# EAGLE board miniArduino (EAGLE 7.7.0)

Size 180.65 x 54.6 mm. Coordinates in mm from the lower left corner, seen from the top.
Outline: 0,0 180.65,0 180.65,54.6 0,54.6 0,0
Copper layers (1*16): Top 0.035mm / dielectric 1.5mm / Bottom 0.035mm
Design rules "default": minimum track width 10mil, minimum drill 24mil, track to track 8mil, track to pad 8mil, pad to pad 8mil, via to via 8mil, smd to smd 8mil, copper to edge 40mil, drill to drill 8mil, minimum pad ring 10mil, minimum via ring 8mil, stop-mask expansion 4mil, vias tented up to drill 0mil, thermal gap 10mil

## Footprints (pad centres in the part's own frame; a part is rotated, then mirrored left to right if it is on the bottom)
C0805 = smd 1.3 x 1.5: 1 -0.95,0; 2 0.95,0
2X3 = drill 1.016 pad 1.88 octagon: 1 0,0; 2 0,2.54; 3 2.54,0; 4 2.54,2.54; 5 5.08,0; 6 5.08,2.54
CHIP-LED0805 = smd 1.2 x 1.2: A 0,-1.05; C 0,1.05
PJ-102A = drill 3 pad 4.8: RING 0.1,-3.39; RING_SW -4.6,-6.29; TIP 0.1,-9.29
1X05 = drill 1.016 long: 1 -5.08,0; 2 -2.54,0; 3 0,0; 4 2.54,0; 5 5.08,0
R0805 = smd 1.3 x 1.5: 1 -0.95,0; 2 0.95,0
2X10 = drill 1.016 octagon: 1 -11.43,-1.27; 2 -11.43,1.27; 3 -8.89,-1.27; 4 -8.89,1.27; 5 -6.35,-1.27; 6 -6.35,1.27; 7 -3.81,-1.27; 8 -3.81,1.27; 9 -1.27,-1.27; 10 -1.27,1.27; 11 1.27,-1.27; 12 1.27,1.27; 13 3.81,-1.27; 14 3.81,1.27; 15 6.35,-1.27; 16 6.35,1.27; 17 8.89,-1.27; 18 8.89,1.27; 19 11.43,-1.27; 20 11.43,1.27
1X06 = drill 1.016 octagon: 1 -6.35,0; 2 -3.81,0; 3 -1.27,0; 4 1.27,0; 5 3.81,0; 6 6.35,0
TQFP32-08 = smd 1.27 x 0.559: 1 -4.293,2.8; 2 -4.293,2; 3 -4.293,1.2; 4 -4.293,0.4; 5 -4.293,-0.4; 6 -4.293,-1.2; 7 -4.293,-2; 8 -4.293,-2.8; 17 4.293,-2.8; 18 4.293,-2; 19 4.293,-1.2; 20 4.293,-0.4; 21 4.293,0.4; 22 4.293,1.2; 23 4.293,2; 24 4.293,2.8 | smd 0.559 x 1.27: 9 -2.8,-4.293; 10 -2,-4.293; 11 -1.2,-4.293; 12 -0.4,-4.293; 13 0.4,-4.293; 14 1.2,-4.293; 15 2,-4.293; 16 2.8,-4.293; 25 2.8,4.293; 26 2,4.293; 27 1.2,4.293; 28 0.4,4.293; 29 -0.4,4.293; 30 -1.2,4.293; 31 -2,4.293; 32 -2.8,4.293
A4988_BREAKOUT = drill 1.016: 1 1.27,1.27; 2 3.81,1.27; 3 6.35,1.27; 4 8.89,1.27; 5 11.43,1.27; 6 13.97,1.27; 7 16.51,1.27; 8 19.05,1.27; 9 19.05,-11.43; 10 16.51,-11.43; 11 13.97,-11.43; 12 11.43,-11.43; 13 8.89,-11.43; 14 6.35,-11.43; 15 3.81,-11.43; 16 1.27,-11.43
HC49UP = smd 5.334 x 1.93: 1 -4.826,0; 2 4.826,0

## Placement (x,y rotation side)
C1  22p  [C0805]  2.54,13.34 90 top
C2  22p  [C0805]  2.54,5.71 270 top
C3  100n  [C0805]  2.54,17.78 0 top
J1  AVR_SPI_PRG_6PTH  [2X3]  5.71,19.68 90 bottom
LED1  [CHIP-LED0805]  15.24,4.45 90 top
POWER_12V  2.1MMJACKTHM  [PJ-102A]  41.91,31.75 0 top
POWER_12V_TO_5V  [1X05]  133.35,21.59 0 top
R1  10k  [R0805]  2.54,21.59 90 top
R2  1k  [R0805]  19.05,4.45 0 top
SCD  [2X10]  74.93,5.08 0 top
SPI_TO_RAS_PI  [1X06]  81.28,19.05 0 top
U2  ATMEGA328P_TQFP  [TQFP32-08]  15.88,13.34 0 top
U$1  A4998_BREAKOUT  [A4988_BREAKOUT]  97.79,15.24 0 top
Y1  [HC49UP]  6.35,9.53 90 top

## Library data of the parts
C1-C3 = rcl
J1 = SparkFun-Connectors
LED1 POWER_12V SPI_TO_RAS_PI = adafruit
POWER_12V_TO_5V SCD = pinhead2
R1 R2 = resistor
U2 = SparkFun-DigitalIC; PROD_ID: IC-09069
U$1 = tim
Y1 = SparkFun-FreqCtrl

## Nets
5V: POWER_12V.TIP
GND: C1.1 C2.1 C3.1 J1.6 LED1.C POWER_12V.RING POWER_12V.RING_SW U2.3 U2.5 U2.21
N$1: J1.1 U2.16
N$2: J1.3 R2.2 U2.17
N$3: J1.4 U2.15
N$4: C3.2 J1.2 R1.1 U2.4 U2.6 U2.18 U2.20
N$6: LED1.A R2.1
N$7: J1.5 R1.2 U2.29
N$8: C1.2 U2.7 Y1.2
N$9: C2.2 U2.8 Y1.1

## Tracks (layer width: path | path; a pad name or v marks a point on that pad's centre or on a via)
GND  (9 unrouted)
N$1  (1 unrouted)
N$2  (2 unrouted)
N$3  (1 unrouted)
N$4  (6 unrouted)
N$6  (1 unrouted)
N$7  (2 unrouted)
N$8  (2 unrouted)
N$9  (2 unrouted)